# Altium PCB PCB4.PcbDoc
Units mm, origin at the board's own origin, x right, y up, seen from the top; angles counter-clockwise.
Board outline 95.12 x 91.06 mm, 2 copper layers (Top Layer, Bottom Layer); 22 components, 42 nets, 104 pads, 0 vias.
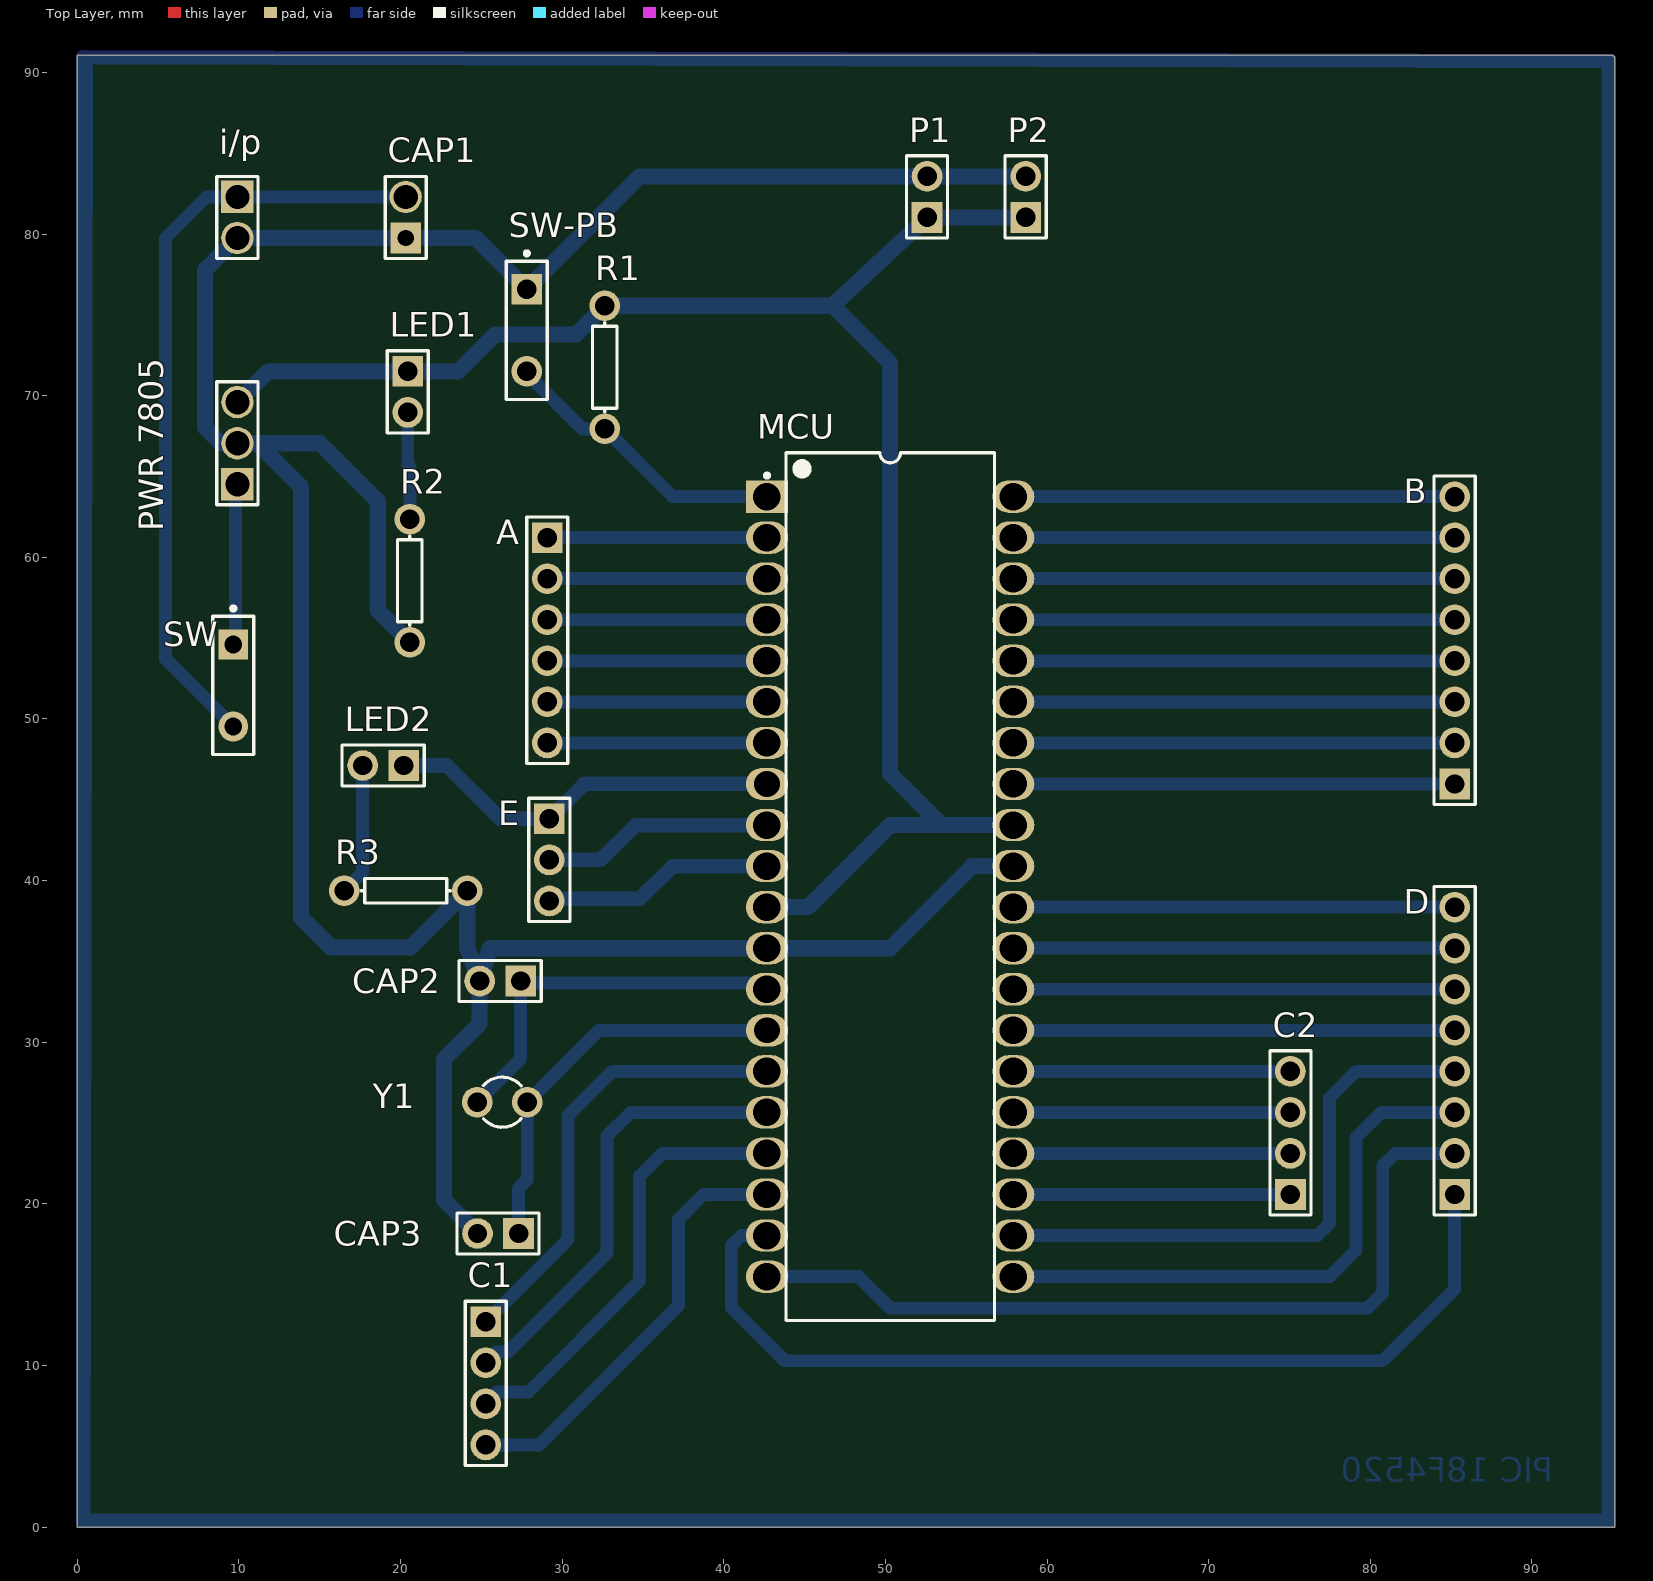
[diagram p0: Top Layer view]
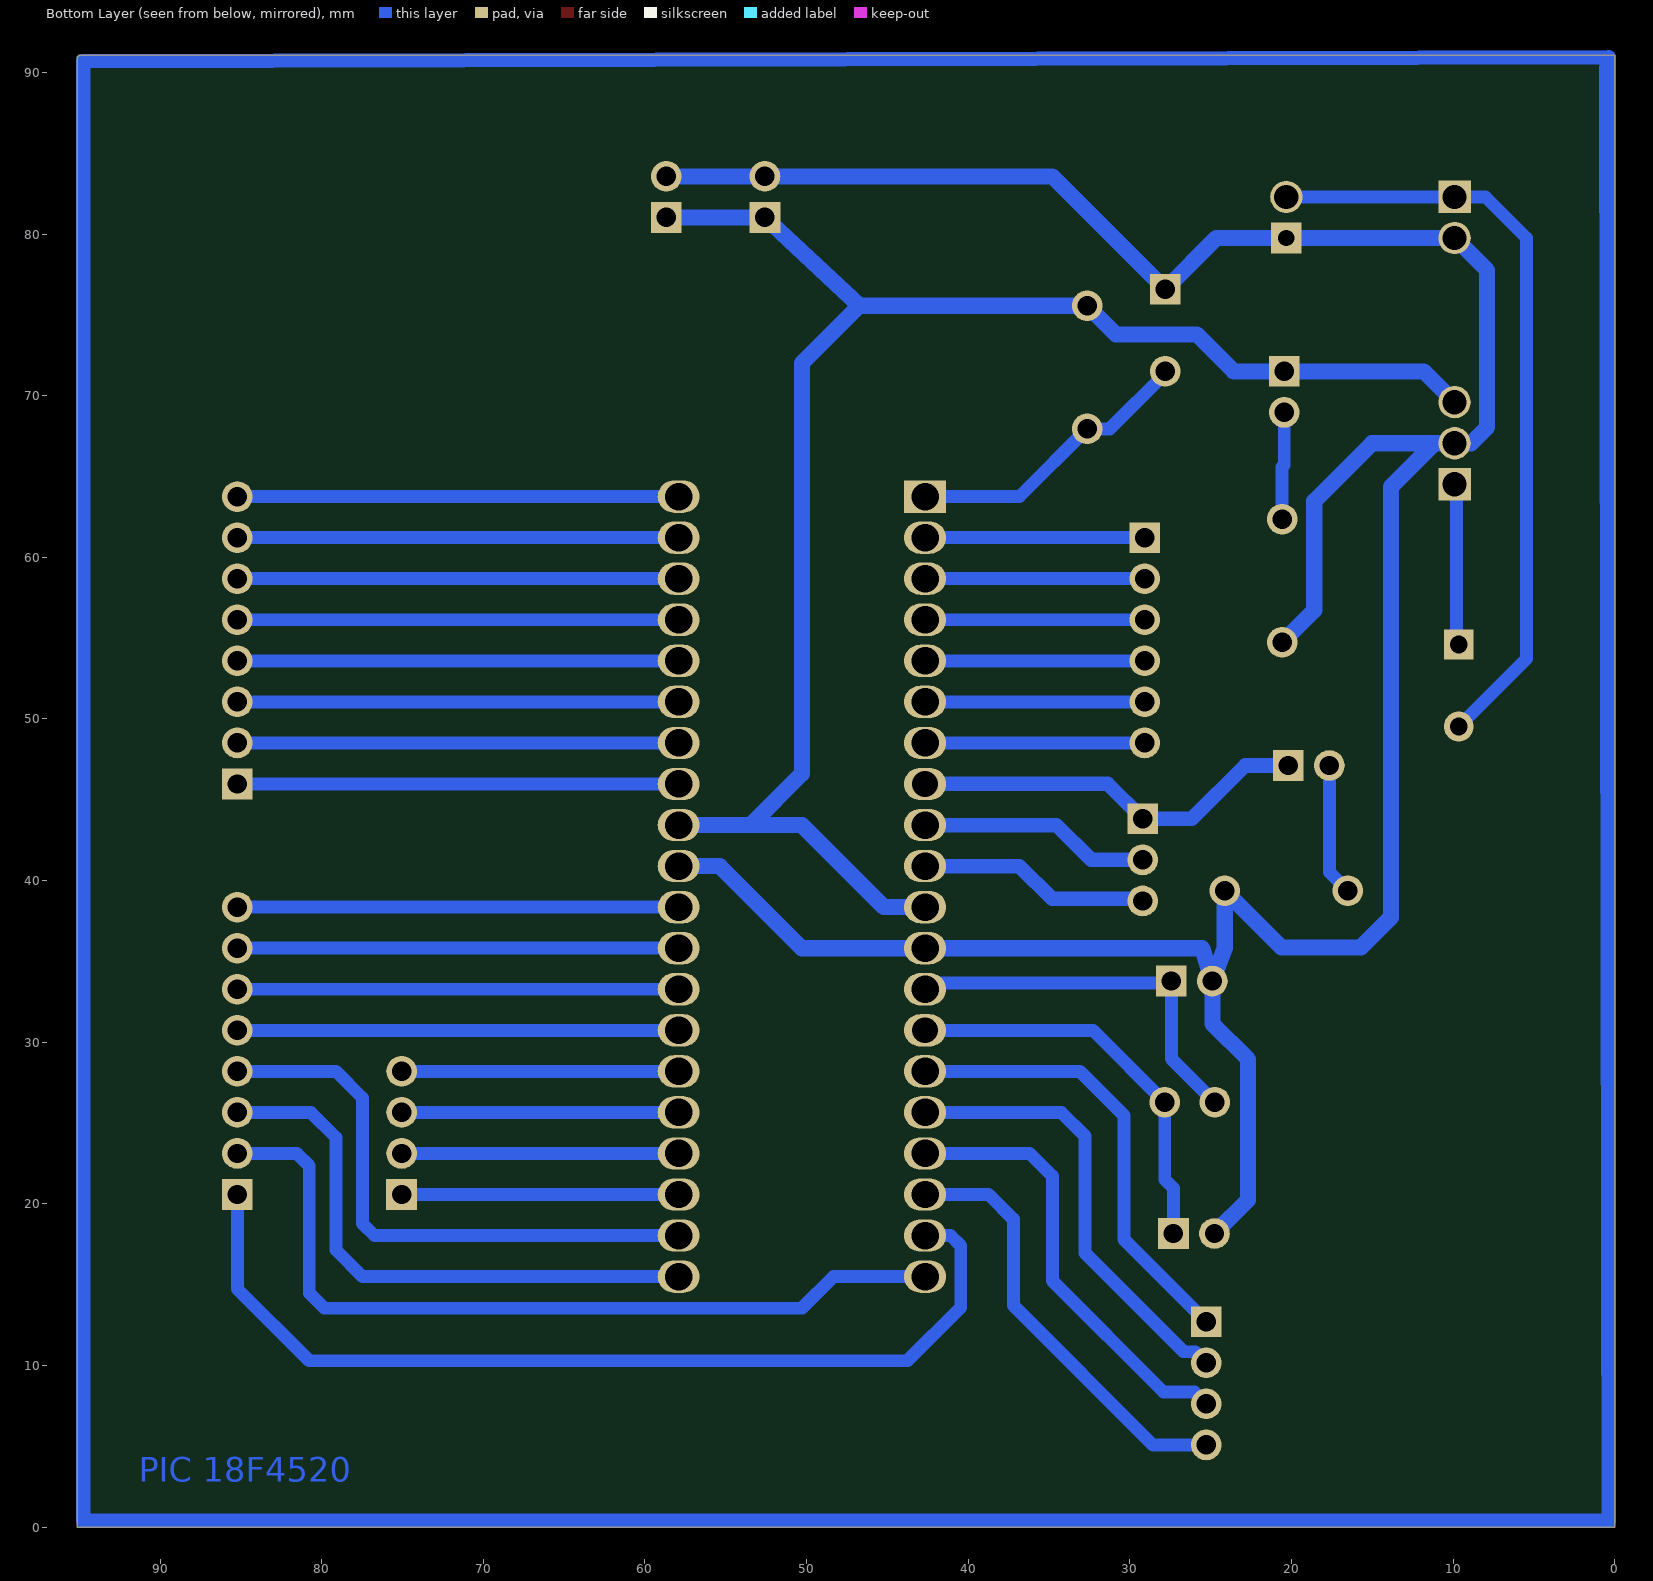
[diagram p1: Bottom Layer view, seen from below]

## Layer stack, top to bottom
Top Layer: signal copper 0.0356
Dielectric: dielectric 0.32, FR-4, Dk 4.8
Bottom Layer: signal copper 0.0356

## Board outline
0,0 95.123,0 95.123,90.932 94.996,91.059 0,91.059 0,0

## Design rules (kind name [scope] priority, off if disabled: settings)
Clearance [All] p1: gap=0.5
PolygonConnect [All] p1: connectstyle=Relief reliefconductorwidth=0.254 reliefentries=4 polygonreliefangle="90 Angle"
RoutingLayers [All] p1: top layer_v5=FALSE bottom layer_v5=TRUE
RoutingVias [All] p1: holewidth=0.711 width=1.27 viastyle="Through Hole" minholewidth=0.711 minwidth=1.27 maxholewidth=0.711 maxwidth=1.27
SilkscreenOverComponentPads [All] p1: minsilkscreentomaskgap=0.254
SolderMaskExpansion [All] p1: expansion=0.102
Width Width_2 [InNet('VCC')] p1: maxlimit=1 minlimit=0.9 preferedwidth=1
Width Width_1 [InNet('GND')] p2: maxlimit=1 minlimit=0.9 preferedwidth=1
Width [All] p3: maxlimit=1 minlimit=0.7 preferedwidth=0.8
26 further rules are at their usual default settings.

## Components (designator, comment, footprint, x,y, rotation, side; value= is the part's Value field where it differs from the comment)
A "Header 6" HDR1X6 29.083,61.214 r270 top
B "Header 8" HDR1X8 85.217,45.974 r90 top
C1 "Header 4" HDR1X4 25.273,12.7 r270 top
C2 "Header 4" HDR1X4 75.057,20.574 r90 top
CAP1 "Cap" HDR1X2#1 20.32,79.756 r90 top
CAP2 "Cap" HDR1X2#2 27.432,33.782 r180 top
CAP3 "Cap" HDR1X2#2 27.305,18.161 r180 top
D "Header 8" HDR1X8 85.217,20.574 r90 top
E "Header 3" HDR1X3#1 29.21,43.815 r270 top
i/p "Header 2" HDR1X2#3 9.906,82.296 r270 top
LED1 "LED2" HDR1X2#2 20.447,71.501 r270 top
LED2 "LED2" HDR1X2#2 20.193,47.117 r180 top
MCU "PIC18F4520-I/P" PDIP600-P40 50.292,39.624 r0 top
P1 "Header 2" HDR1X2#2 52.578,81.026 r90 top
P2 "Header 2" HDR1X2#2 58.674,81.026 r90 top
"PWR 7805" "Header 3" HDR1X3#2 9.906,64.516 r90 top
R1 "Res1" AXIAL-0.3 32.639,71.755 r90 top
R2 "Res1" AXIAL-0.3 20.574,58.547 r90 top
R3 "Res1" AXIAL-0.3 20.32,39.37 r180 top
SW "SW-SPST" SPST-2#1 9.652,52.07 r270 top
SW-PB "SW-PB" SPST-2#2 27.813,74.041 r270 top
Y1 "XTAL" R38 26.289,26.289 r90 top

## Footprints (in the part's own frame and the unit in brackets; to place one, negate y for a bottom-side part, rotate by r counter-clockwise, add the part's x,y. Pads: shape width x height; smd on the part's side, far side on the other; paste and mask are expansions set on the pad)
AXIAL-0.3 [mm] "Axial Device, Thru-Hole; 2 Leads; 0.3 in Pin Spacing"
  round 1.9 hole 1.2: 1(-3.81,0) 2(3.81,0)
  silkscreen extent -2.77,-0.76 2.77,0.76
HDR1X2#1 [mm] "Connector; Header; 2 Position"
  rect 1.9x1.9 hole 1: 1(0,0)
  round 2 hole 1.5: 2(2.54,0)
  silkscreen extent -1.27,-1.27 3.81,1.27
HDR1X2#2 [mm] "Connector; Header; 2 Position"
  rect 1.9x1.9 hole 1.2: 1(0,0)
  round 1.9 hole 1.2: 2(2.54,0)
  silkscreen extent -1.27,-1.27 3.81,1.27
HDR1X2#3 [mm] "Connector; Header; 2 Position"
  rect 2x2 hole 1.5: 1(0,0)
  round 2 hole 1.5: 2(2.54,0)
  silkscreen extent -1.27,-1.27 3.81,1.27
HDR1X3#1 [mm] "Connector; Header; 3 Position"
  rect 1.9x1.9 hole 1.2: 1(0,0)
  round 1.9 hole 1.2: 2(2.54,0) 3(5.08,0)
  silkscreen extent -1.27,-1.27 6.35,1.27
HDR1X3#2 [mm] "Connector; Header; 3 Position"
  rect 2x2 hole 1.5: 1(0,0)
  round 2 hole 1.5: 2(2.54,0) 3(5.08,0)
  silkscreen extent -1.27,-1.27 6.35,1.27
HDR1X4 [mm] "Connector; Header; 4 Position"
  rect 1.9x1.9 hole 1.2: 1(0,0)
  round 1.9 hole 1.2: 2(2.54,0) 3(5.08,0) 4(7.62,0)
  silkscreen extent -1.27,-1.27 8.89,1.27
HDR1X6 [mm] "Connector; Header; 6 Position"
  rect 1.9x1.9 hole 1.2: 1(0,0)
  round 1.9 hole 1.2: 2(2.54,0) 3(5.08,0) 4(7.62,0) 5(10.16,0) 6(12.7,0)
  silkscreen extent -1.27,-1.27 13.97,1.27
HDR1X8 [mm] "Connector; Header; 8 Position"
  rect 1.9x1.9 hole 1.2: 1(0,0)
  round 1.9 hole 1.2: 2(2.54,0) 3(5.08,0) 4(7.62,0) 5(10.16,0) 6(12.7,0) 7(15.24,0) 8(17.78,0)
  silkscreen extent -1.27,-1.27 19.05,1.27
PDIP600-P40 [mm] "DIP, 40-Leads, Row Spacing 15.24mm, Pitch 2.54mm, Body 51.8x13.5mm"
  rect 2.6x2 hole 1.7: 1(-7.62,24.13)
  oval 2.6x2 hole 1.7: 2(-7.62,21.59) 3(-7.62,19.05) 4(-7.62,16.51) 5(-7.62,13.97) 6(-7.62,11.43) 7(-7.62,8.89) 9(-7.62,3.81) 10(-7.62,1.27) 11(-7.62,-1.27) 12(-7.62,-3.81) 13(-7.62,-6.35) 15(-7.62,-11.43) 16(-7.62,-13.97) 17(-7.62,-16.51) 18(-7.62,-19.05) 19(-7.62,-21.59) 20(-7.62,-24.13) 21(7.62,-24.13) 22(7.62,-21.59) 23(7.62,-19.05) 24(7.62,-16.51) 25(7.62,-13.97) 26(7.62,-11.43) 27(7.62,-8.89) 28(7.62,-6.35) 29(7.62,-3.81) 30(7.62,-1.27) 31(7.62,1.27) 32(7.62,3.81) 33(7.62,6.35) 34(7.62,8.89) 35(7.62,11.43) 36(7.62,13.97) 37(7.62,16.51) 38(7.62,19.05) 39(7.62,21.59) 40(7.62,24.13)
  oval 2.6x2 hole 1.6: 8(-7.62,6.35) 14(-7.62,-8.89)
  silkscreen extent -7.74,-26.85 6.45,26.85, body extent -7.3,-26.85 7.3,26.85, height 6.35
R38 [mm] "Crystal, Thru-Hole; 2 Leads; Body 3.1 x 8.2 mm (Dia.xH)"
  round 1.9 hole 1.2: 1(0,1.55) 2(0,-1.55)
  silkscreen extent -1.55,-1.19 1.55,1.17
SPST-2#1 [mm] "Switch; 2 Leads"
  rect 1.85x1.85 hole 1.1: 1(-2.54,0)
  round 1.85 hole 1.1: 2(2.54,0)
  silkscreen extent -4.89,-1.27 4.28,1.27
SPST-2#2 [mm] "Switch; 2 Leads"
  rect 1.9x1.9 hole 1.2: 1(-2.54,0)
  round 1.9 hole 1.2: 2(2.54,0)
  silkscreen extent -4.89,-1.27 4.28,1.27

## Part data
A: "Header, 6-Pin"
B D: "Header, 8-Pin"
C1 C2: "Header, 4-Pin"
CAP1 CAP2 CAP3: "Capacitor"
E "PWR 7805": "Header, 3-Pin"
i/p P1 P2: "Header, 2-Pin"
LED1 LED2: "Typical RED, GREEN, YELLOW, AMBER GaAs LED"
MCU: "Enhanced Flash Microcontroller with 10-Bit A/D and nanoWatt Technology, 32K Flash, 40-Pin PDIP, Industrial Temperature Range"
R1 R2 R3: "Resistor"
SW: "Single-Pole, Single-Throw Switch"
SW-PB: "Switch"
Y1: "Crystal Oscillator"

## Nets (pads, with @x,y where several pads share a name; then routed paths per layer and width w, separated by ;. In a path a pad name is that pad's centre, name@x,y a point inside that pad or via, vN(x,y) a via of type N, cw(c..) or ccw(c..) an arc to the next point about the centre after c; other vN are vias at no path point)
A.0: A.1 MCU.2 | length 13.6
  Bottom Layer w0.8: A.1 MCU.2
A.1: A.2 MCU.3 | length 13.6
  Bottom Layer w0.8: A.2 MCU.3
A.2: A.3 MCU.4 | length 13.6
  Bottom Layer w0.8: A.3 MCU.4
A.3: A.4 MCU.5 | length 13.6
  Bottom Layer w0.8: A.4 MCU.5
A.4: A.5 MCU.6 | length 13.6
  Bottom Layer w0.8: A.5 MCU.6
A.5: A.6 MCU.7 | length 13.6
  Bottom Layer w0.8: A.6 MCU.7
B.0: B.1 MCU.33 | length 27.3
  Bottom Layer w0.8: MCU.33 B.1
B.1: B.2 MCU.34 | length 27.3
  Bottom Layer w0.8: MCU.34 B.2
B.2: B.3 MCU.35 | length 27.3
  Bottom Layer w0.8: MCU.35 B.3
B.3: B.4 MCU.36 | length 27.3
  Bottom Layer w0.8: MCU.36 B.4
B.4: B.5 MCU.37 | length 27.3
  Bottom Layer w0.8: MCU.37 B.5
B.5: B.6 MCU.38 | length 27.3
  Bottom Layer w0.8: MCU.38 B.6
B.6: B.7 MCU.39 | length 27.3
  Bottom Layer w0.8: MCU.39 B.7
B.7: B.8 MCU.40 | length 27.3
  Bottom Layer w0.8: MCU.40 B.8
C.0: C1.1 MCU.15 | length 28.3
  Bottom Layer w0.8: C1.1 30.353,17.78 30.353,25.451 33.096,28.194 MCU.15
C.1: C1.2 MCU.16 | length 28.1
  Bottom Layer w0.8: C1.2 25.959,10.846 26.67,10.846 32.766,16.942 32.766,24.185 34.235,25.654 MCU.16
C.2: C1.3 MCU.17 | length 27.6
  Bottom Layer w0.8: C1.3 26.01,8.357 27.915,8.357 34.798,15.24 34.798,21.717 36.195,23.114 MCU.17
C.3: C1.4 MCU.18 | length 26.9
  Bottom Layer w0.8: C1.4 28.575,5.08 37.211,13.716 37.211,19.05 38.735,20.574 MCU.18
C.4: C2.1 MCU.23 | length 17.1
  Bottom Layer w0.8: MCU.23 C2.1
C.5: C2.2 MCU.24 | length 17.1
  Bottom Layer w0.8: MCU.24 C2.2
C.6: C2.3 MCU.25 | length 17.1
  Bottom Layer w0.8: MCU.25 C2.3
C.7: C2.4 MCU.26 | length 17.1
  Bottom Layer w0.8: MCU.26 C2.4
D.0: D.1 MCU.19 | length 60.1
  Bottom Layer w0.8: MCU.19 41.097,18.034 40.462,17.399 40.462,13.589 43.764,10.287 80.772,10.287 85.217,14.732 D.1
D.1: D.2 MCU.20 | length 51.9
  Bottom Layer w0.8: MCU.20 48.336,15.494 50.292,13.538 79.832,13.538 80.772,14.478 80.772,22.35 81.536,23.114 D.2
D.2: D.3 MCU.21 | length 35.6
  Bottom Layer w0.8: MCU.21 77.47,15.494 79.121,17.145 79.121,24.105 80.67,25.654 D.3
D.3: D.4 MCU.22 | length 36.1
  Bottom Layer w0.8: MCU.22 76.733,18.034 77.47,18.771 77.47,26.543 79.121,28.194 D.4
D.4: D.5 MCU.27 | length 27.3
  Bottom Layer w0.8: MCU.27 D.5
D.5: D.6 MCU.28 | length 27.3
  Bottom Layer w0.8: MCU.28 D.6
D.6: D.7 MCU.29 | length 27.3
  Bottom Layer w0.8: MCU.29 D.7
D.7: D.8 MCU.30 | length 27.3
  Bottom Layer w0.8: MCU.30 D.8
E.0: E.1 LED2.1 MCU.8 | length 24.9
  Bottom Layer w0.9: LED2.1 22.86,47.117 26.162,43.815 E.1 ; E.1@29.337,43.815 E.1 ; MCU.8 31.369,45.974 E.1
E.1: E.2 MCU.9 | length 14.4
  Bottom Layer w0.9: E.2 32.385,41.275 34.544,43.434 MCU.9
E.2: E.3 MCU.10 | length 14.4
  Bottom Layer w0.9: E.3 29.337,38.862 34.798,38.862 36.83,40.894 MCU.10
GND: "PWR 7805.2" CAP1.1 CAP2.2 CAP3.2 i/p.2 MCU.12 MCU.31 P1.2 P2.2 R2.1 R3.1 SW-PB.1 | length 190.4
  Bottom Layer w1: R2.1 18.593,56.718 18.593,63.475 15.011,67.056 11.151,67.056 ; CAP3.2 22.682,20.244 22.682,28.931 24.892,31.14 CAP2.2 ; MCU.31 55.372,40.894 50.292,35.814 MCU.12 25.527,35.814 CAP2.2 ; P2.2 P1.2 34.798,83.566 SW-PB.1 24.638,79.756 CAP1.1 i/p.2 7.899,77.749 7.899,68.047 8.89,67.056 9.906,67.056 11.151,67.056 ; 11.151,67.056 13.843,64.364 13.843,37.719 15.697,35.865 20.625,35.865 R3.1 24.13,35.814 CAP2.2
MCLR: MCU.1 R1.1 SW-PB.2 | length 18.1
  Bottom Layer w0.8: SW-PB.2 27.813,71.374 31.242,67.945 R1.1 36.83,63.754 MCU.1
NetCAP1_2: CAP1.2 i/p.1 SW.2 | length 47.9
  Bottom Layer w0.8: SW.2 5.461,53.721 5.461,79.756 8.001,82.296 i/p.1 CAP1.2
NetLED1_2: LED1.2 R2.2 | length 6.7
  Bottom Layer w0.8: LED1.2 20.447,65.71 20.574,65.583 R2.2
NetLED2_2: LED2.2 R3.2 | length 8.2
  Bottom Layer w0.8: R3.2 17.653,40.513 LED2.2
"NetPWR 7805_1": "PWR 7805.1" SW.1 | length 10
  Bottom Layer w0.8: SW.1 9.779,54.737 9.779,64.389 9.906,64.516
OSC1: CAP2.1 MCU.13 Y1.1 | length 24.1
  Bottom Layer w0.8: Y1.1 27.432,28.982 CAP2.1 27.559,33.655 42.291,33.655 MCU.13
OSC2: CAP3.1 MCU.14 Y1.2 | length 25
  Bottom Layer w0.8: CAP3.1 27.305,20.962 27.839,21.496 Y1.2 32.284,30.734 MCU.14
VCC: "PWR 7805.3" LED1.1 MCU.11 MCU.32 P1.1 P2.1 R1.2 | length 105.7
  Bottom Layer w1: 9.906,69.596 11.811,71.501 LED1.1 23.571,71.501 25.857,73.787 30.861,73.787 R1.2 46.736,75.565 ; MCU.11 45.212,38.354 50.292,43.434 53.467,43.434 ; MCU.32 53.467,43.434 ; P2.1 P1.1 46.736,75.565 ; 46.736,75.565 50.292,72.009 50.292,46.609 53.467,43.434
copper on no net: | length 459.4
  Bottom Layer w0.9: 0.508,0.381 94.742,0.381 94.742,90.678 0.381,90.932 0.381,0.381 0.508,90.297

## Other copper
Bottom Layer:
  text "PIC 18F4520" at 91.313,2.794 h1.52